# EAGLE board masterPuck02 (EAGLE 8.6.0)
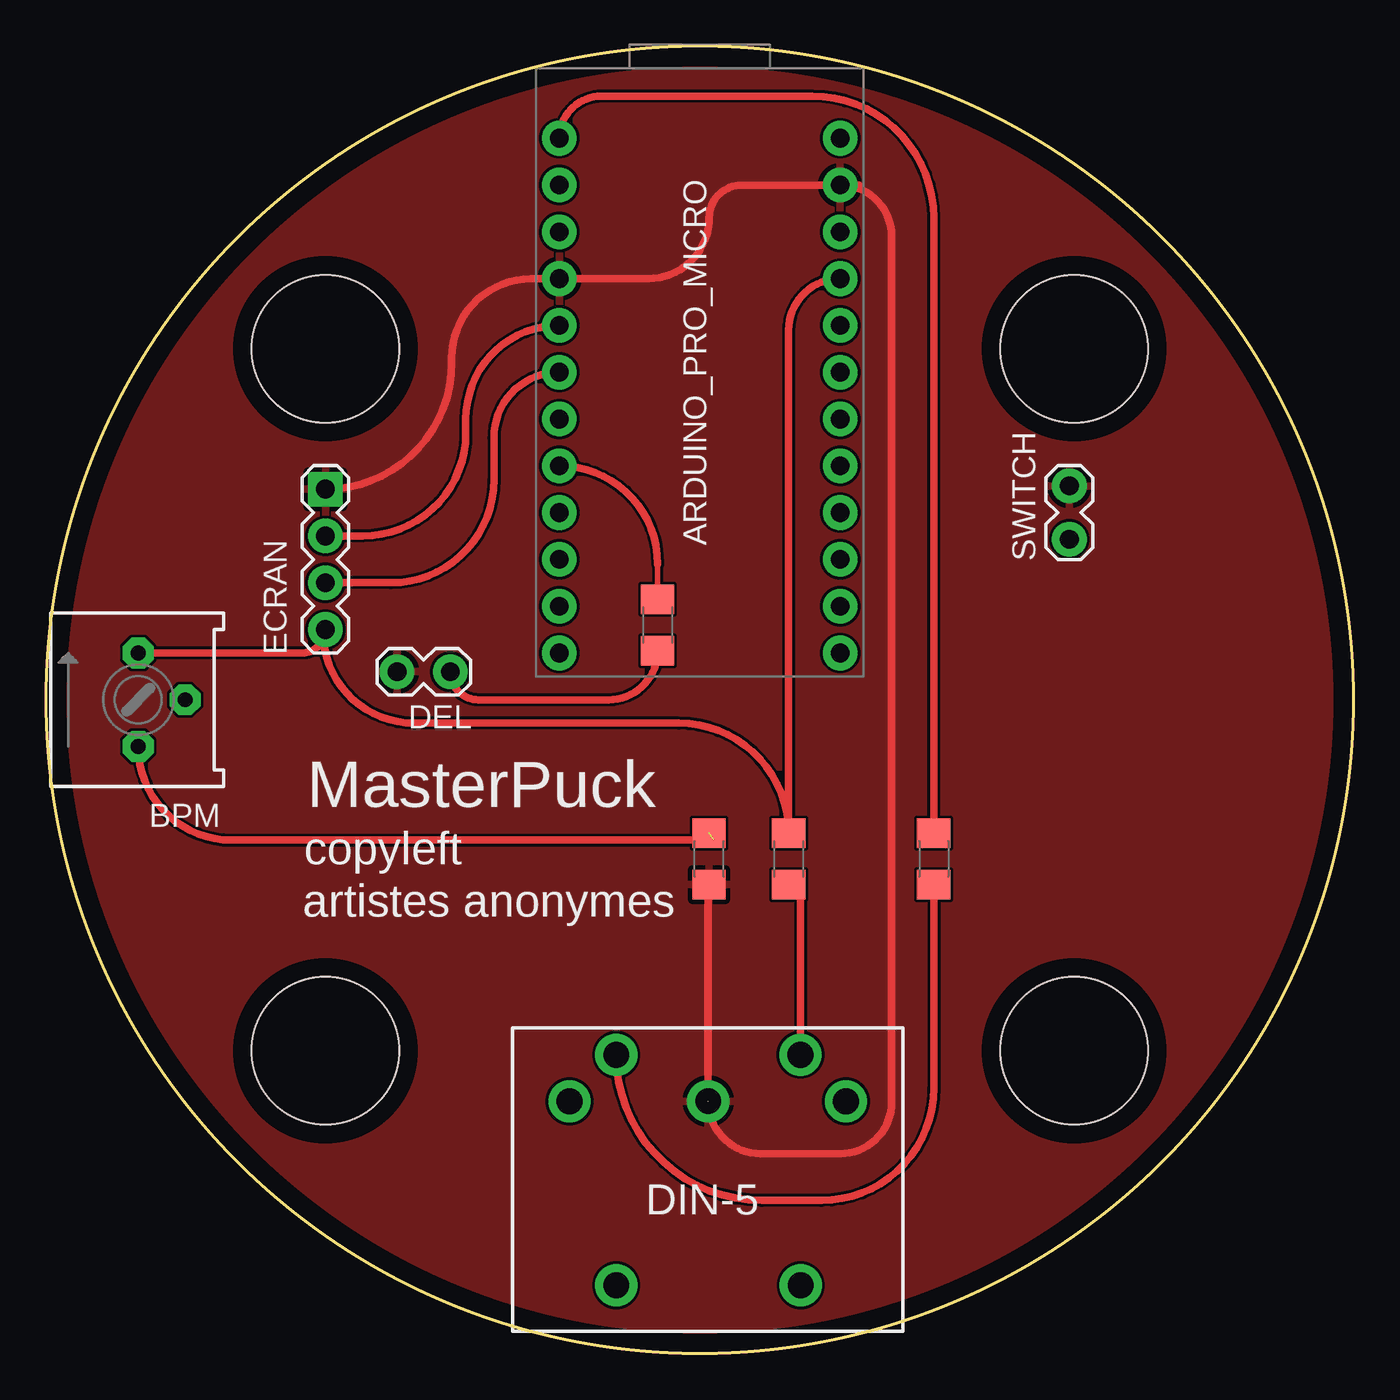
[diagram p0: board, top side]
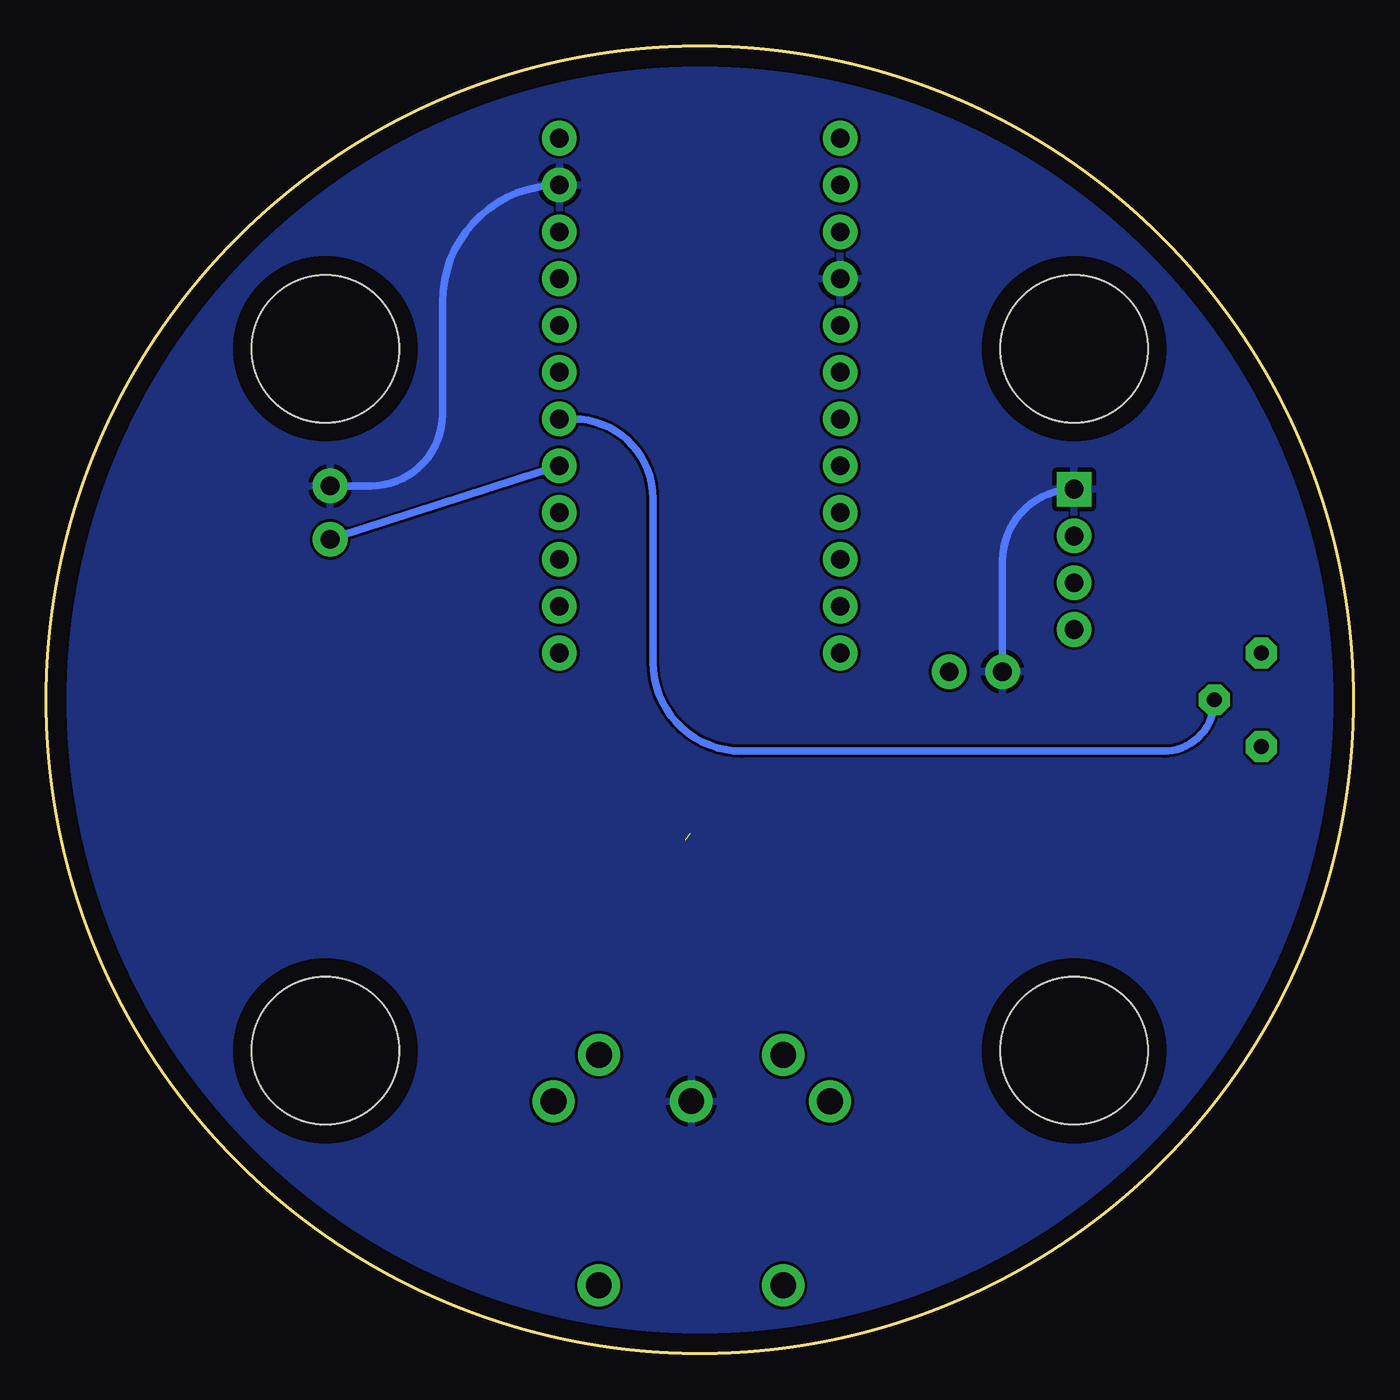
[diagram p1: board, bottom side, seen from below]

Size 70.97 x 70.97 mm. Coordinates in mm from the lower left corner, seen from the top.
Outline: circle at 35.48,35.48 radius 35.48
Copper layers (1*16): Top 0.035mm / dielectric 1.5mm / Bottom 0.035mm
Design rules "default": minimum track width 6mil, minimum drill 0.35mm, track to track 6mil, track to pad 6mil, pad to pad 6mil, via to via 6mil, smd to smd 6mil, copper to edge 40mil, drill to drill 6mil, minimum pad ring 10mil, minimum via ring 8mil, stop-mask expansion 4mil, vias tented up to drill 0mil, thermal gap 10mil
Holes 8 mm at 15.16,54.53 15.16,16.43 55.8,54.53 55.8,16.43

## Footprints (pad centres in the part's own frame; a part is rotated, then mirrored left to right if it is on the bottom)
3386P = drill 0.813 pad 1.676 octagon: 1 -2.54,0; 2 0,-2.54; 3 2.54,0
1X02_LOCK = drill 1.016 pad 1.88: 1 -0.178,0; 2 2.718,0
1X04 = drill 1.016 pad 1.88 square: 1 0,0 | drill 1.016 pad 1.88: 2 2.54,0; 3 5.08,0; 4 7.62,0
DIN_5_FEMALE_SUPPORT = drill 1.4 pad 2.286: 1 7.94,3.6; 2 0.46,3.61; 3 -7.07,3.6; 4 5.47,6.13; 5 -4.53,6.12; 6 -4.53,-6.382; 7 5.478,-6.382
1206 = smd 1.6 x 1.8: 1 -1.4,0; 2 1.4,0
ARDUINO_PRO_MICRO = drill 1.016 pad 1.88: 1 -7.62,12.7; 2 -7.62,10.16; 3 -7.62,7.62; 4 -7.62,5.08; 5 -7.62,2.54; 6 -7.62,0; 7 -7.62,-2.54; 8 -7.62,-5.08; 9 -7.62,-7.62; 10 -7.62,-10.16; 11 -7.62,-12.7; 12 -7.62,-15.24; 13 7.62,-15.24; 14 7.62,-12.7; 15 7.62,-10.16; 16 7.62,-7.62; 17 7.62,-5.08; 18 7.62,-2.54; 19 7.62,0; 20 7.62,2.54; 21 7.62,5.08; 22 7.62,7.62; 23 7.62,10.16; 24 7.62,12.7

## Placement (x,y rotation side)
BPM  [3386P]  5,35.48 90 top
DEL  [1X02_LOCK]  21.77,37.01 180 top
ECRAN  [1X04]  15.16,46.91 270 top
MIDIOUT  MIDI_CONN_FEMALE_SUPPORT  [DIN_5_FEMALE_SUPPORT]  35.48,10.08 0 top
R1  2k  [1206]  48.18,26.85 270 top
R2  2k  [1206]  40.31,26.85 270 top
R3  22k  [1206]  35.99,26.85 90 top
R4  330 ohms  [1206]  33.2,39.55 270 top
SWITCH  [1X02_LOCK]  55.55,44.37 90 top
U$1  ARDUINO_PRO_MICRO  [ARDUINO_PRO_MICRO]  35.48,53.26 0 top

## Library data of the parts
BPM = bourns.rpt
DEL ECRAN MIDIOUT SWITCH = SparkFun-Connectors
R1-R4 = SparkFun-Passives
U$1 = SparkFun-Boards

## Nets
GND: DEL.2 ECRAN.1 MIDIOUT.2 R3.1 SWITCH.2 U$1.4 U$1.23
N$2: MIDIOUT.5 R1.2
N$3: MIDIOUT.4 R2.2
N$5: R1.1 U$1.1
N$7: ECRAN.2 U$1.5
N$8: ECRAN.3 U$1.6
N$9: BPM.1 R3.2
N$10: BPM.2 U$1.18
N$11: DEL.1 R4.2
N$12: R4.1 U$1.8
N$13: SWITCH.1 U$1.17
VCC: BPM.3 ECRAN.4 R2.1 U$1.21

## Tracks (layer width: path | path; a pad name or v marks a point on that pad's centre or on a via)
GND
  Top 0.406: R3.1 arc90 35.94,25.4 MIDIOUT.2 arc90 38.79,10.85 43.1,10.85 arc90 45.9,13.64 45.9,60.63 arc90 U$1.23 | 44.12,63.42 U$1.23 | ECRAN.1 arc90 22.02,53.77 22.02,54.03 arc-90 26.34,58.34 U$1.4 32.69,58.34 arc90 35.99,61.65 arc-90 37.77,63.42 U$1.23
  Bottom 0.406: DEL.2 19.05,43.03 arc90 ECRAN.1 | SWITCH.2 53.34,47.09 arc-90 49.45,50.98 49.45,57.07 arc90 U$1.23
  pour Bottom: 35.74,70.54 arc-90 70.03,36.25 70.03,35.48 70.03,34.21 arc-90 36.5,0.69 35.48,0.69 arc-90 0.69,35.48 arc-92 37.26,70.54
  pour Top: 35.74,70.54 arc-90 70.03,36.25 70.03,35.48 70.03,34.72 arc-90 36.25,0.94 arc-87 0.69,34.98 arc-97 37.52,70.54
N$2
  Top 0.406: R1.2 48.18,14.4 arc-90 42.09,8.31 38.85,8.31 arc-90 MIDIOUT.5
N$3
  Top 0.406: R2.2 arc-90 40.95,24.8 MIDIOUT.4
N$5
  Top 0.406: R1.1 48.18,61.65 arc90 41.58,68.25 30.15,68.25 arc90 U$1.1
N$7
  Top 0.406: U$1.5 arc90 22.78,50.72 22.78,49.96 arc-90 17.2,44.37 ECRAN.2
N$8
  Top 0.406: U$1.6 arc90 24.31,49.71 24.31,47.42 arc-90 18.72,41.83 ECRAN.3
N$9  (1 unrouted)
  Top 0.406: BPM.1 arc90 10.08,27.86 36.25,27.86
N$10
  Bottom 0.406: BPM.2 arc90 10.34,32.69 33.2,32.69 arc90 38.02,37.52 38.02,46.41 arc-90 42.34,50.72 U$1.18
N$11
  Top 0.406: R4.2 arc-90 30.53,35.48 23.47,35.48 arc-90 DEL.1
N$12
  Top 0.305: 33.2,42.85 R4.1
  Top 0.406: U$1.8 arc-90 33.2,42.85
N$13
  Bottom 0.406: SWITCH.1 U$1.17
VCC
  Top 0.254: 15.04,39.17 ECRAN.4
  Top 0.406: U$1.21 arc90 40.31,55.55 R2.1 arc90 34.34,34.21 19.99,34.21 arc-90 15.04,39.17 | ECRAN.4 arc-90 13.89,38.02 BPM.3

## Text on the board
tNames: MasterPuck | copyleft | artistes anonymes